# Altium PCB 0068Marquee.PcbDoc
Units mil, origin at the board's own origin, x right, y up, seen from the top; angles counter-clockwise.
Board outline 2677.17 x 314.96 mil, 2 copper layers (Top Layer, Bottom Layer); 18 components, 21 nets, 54 pads, 18 vias.
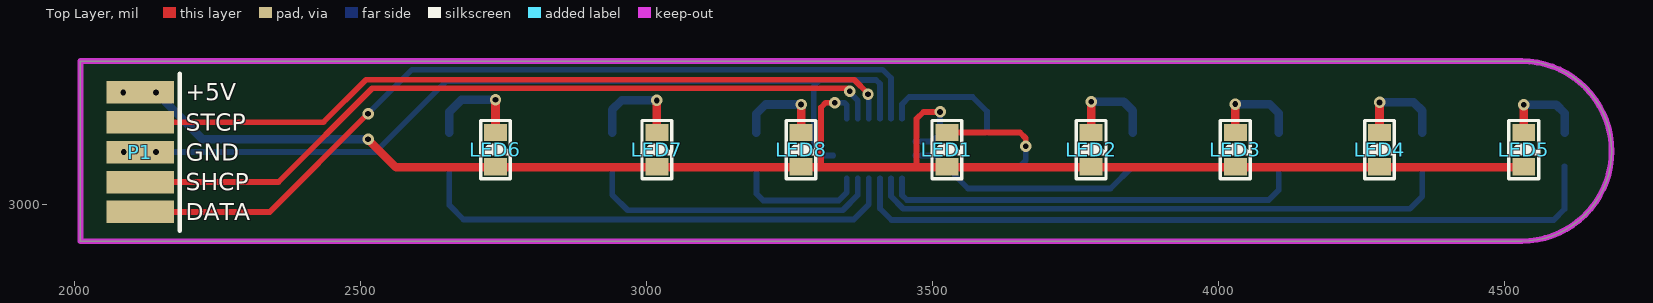
[diagram p0: Top Layer view]
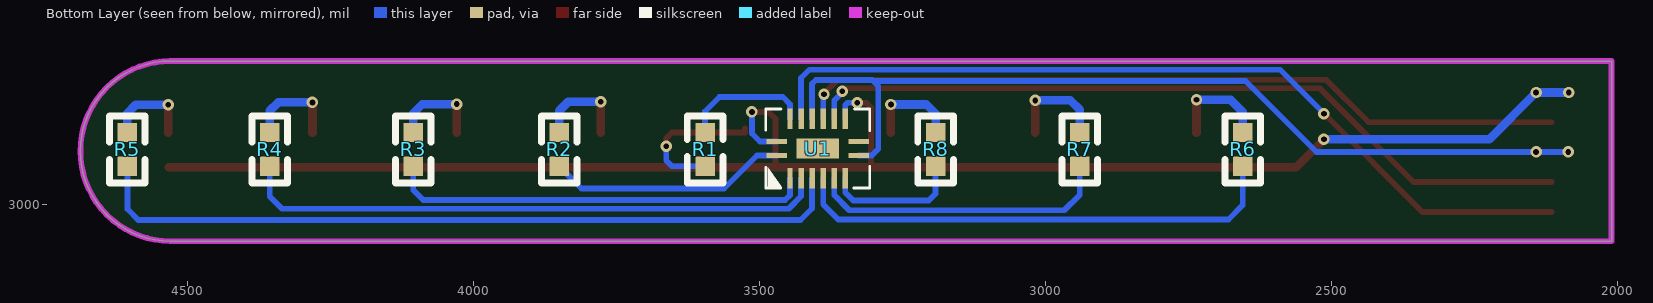
[diagram p1: Bottom Layer view, seen from below]

## Layer stack, top to bottom
Top Solder: solder mask 0.4, Solder Resist, Dk 3.5
Top Layer: signal copper 1.4
Dielectric 1: dielectric 12.6, FR-4, Dk 4.8
Bottom Layer: signal copper 1.4
Bottom Solder: solder mask 0.4, Solder Resist, Dk 3.5

## Board outline
2010,2935 4529.98,2935 ccw(c4529.69,3092.48) 4530,3249.96 2010,3249.96

## Design rules (kind name [scope] priority, off if disabled: settings)
Clearance [All] p1: gap=5
MinimumSolderMaskSliver [All] p1: minsoldermaskwidth=1
PolygonConnect [All] p1: connectstyle=Relief reliefconductorwidth=10 reliefentries=4 polygonreliefangle="90 Angle" airgapwidth=10
RoutingVias [All] p1: holewidth=28 width=50 viastyle="Through Hole" minholewidth=28 minwidth=50 maxholewidth=28 maxwidth=50
SilkToSilkClearance [All] p1: silktosilkclearance=2
SilkToSolderMaskClearance [IsPad] p1: minsilkscreentomaskgap=0 clearancetoexposedcopper=TRUE
SolderMaskExpansion [All] p1: expansion=4
Width [All] p1: maxlimit=100 minlimit=10 preferedwidth=15
27 further rules are at their usual default settings.

## Components (designator, comment, footprint, x,y, rotation, side; value= is the part's Value field where it differs from the comment)
LED1 "LED" SMDLED-0603 3525,3065 r180 top
LED2 "LED" SMDLED-0603 3777.14,3065 r180 top
LED3 "LED" SMDLED-0603 4029.29,3065 r180 top
LED4 "LED" SMDLED-0603 4281.43,3065 r180 top
LED5 "LED" SMDLED-0603 4533.57,3065 r180 top
LED6 "LED" SMDLED-0603 2735.71,3065 r180 top
LED7 "LED" SMDLED-0603 3017.86,3065 r180 top
LED8 "LED" SMDLED-0603 3270,3065 r180 top
P1 "CON5_1" HDR5X1_B 2115,3090 r270 top
R1 "2k" 0603P 3595,3125 r270 bottom
R2 "2k" 0603P 3850,3066.06 r90 bottom
R3 "2k" 0603P 4105,3066.06 r90 bottom
R4 "2k" 0603P 4356,3066.06 r90 bottom
R5 "2k" 0603P 4605,3066.06 r90 bottom
R6 "2k" 0603P 2655,3066.06 r90 bottom
R7 "2k" 0603P 2940,3066.06 r90 bottom
R8 "2k" 0603P 3192,3066.06 r90 bottom
U1 "75HC595" SOT763-1 3398,3097 r180 bottom

## Footprints (in the part's own frame and the unit in brackets; to place one, negate y for a bottom-side part, rotate by r counter-clockwise, add the part's x,y. Pads: shape width x height; smd on the part's side, far side on the other; paste and mask are expansions set on the pad)
0603P [mil]
  rect 33.94x33.94 smd: 1(0,0) 2(58.94,0)
  silkscreen extent -29,-31 88,31
HDR5X1_B [mm]
  rect 1x3 smd: 1(-2.68,0) 2(-1.35,0) 3(-0.02,0) 4(1.31,0) 5(2.64,0)
  silkscreen extent -3.5,1.74 3.48,1.74
SMDLED-0603 [mil]
  rect 40x30 smd: 1(0,0) 2(0,-60)
  silkscreen extent -27,-81 27,21
SOT763-1 [mm]
  rect 1.9x0.9 smd: 0(0,0)
  rect 0.9x0.24 smd: 1(-1.82,-0.31) 8(1.82,-0.31) 9(1.82,0.31) 16(-1.82,0.31)
  rect 0.24x0.9 smd: 2(-1.23,-1.32) 3(-0.74,-1.32) 4(-0.25,-1.32) 5(0.24,-1.32) 6(0.73,-1.32) 7(1.22,-1.32) 10(1.22,1.32) 11(0.73,1.32) 12(0.24,1.32) 13(-0.25,1.32) 14(-0.74,1.32) 15(-1.23,1.32)
  silkscreen extent -2.31,-1.75 2.31,1.76, body extent -2.09,-1.56 2.09,1.56, height 0.51

## Part data
P1: "Connector"
R1 R2 R3 R4 R5 R6 R7 R8: library part R, "贴片电阻"
U1: library part 74HC595, "IC 8BIT SHIFT REGISTER 16-DHVQFN"

## Via types
v1: diameter 20, hole 10, Top Layer to Bottom Layer, 18 vias

## Nets (pads, with @x,y where several pads share a name; then routed paths per layer and width w, separated by ;. In a path a pad name is that pad's centre, name@x,y a point inside that pad or via, vN(x,y) a via of type N, cw(c..) or ccw(c..) an arc to the next point about the centre after c; other vN are vias at no path point)
GND: P1.3 U1.8 U1.13 | length 1599.5
  Bottom Layer w10: v1(2086,3091) 2526,3091 2650,3215 3301,3215 ; U1.8 3303.41,3084.8 3292.2,3096 3292.2,3206.2 3303,3217 3401,3217 3407.84,3210.16 U1.13
  other v1: 2142,3091
NetLED1_2: LED1.2 R1.2 | length 260.3
  Top Layer w10: LED1.2@3525,3132 LED1.2 3653,3125 3663,3115 v1(3663,3101)
  Bottom Layer w10: R1.2 3653.06,3066.06 3663,3076 v1(3663,3101)
NetLED2_2: LED2.2 R2.2 | length 171.3
  Top Layer w15: LED2.2 v1(3777.14,3178.86)
  Bottom Layer w15: v1(3777.14,3178.86) 3834.14,3178.86 3850,3163 R2.2
NetLED3_2: LED3.2 R3.2 | length 165.9
  Top Layer w15: LED3.2 v1(4029.29,3174.71)
  Bottom Layer w15: v1(4029.29,3174.71) 4089.29,3174.71 4105,3159 R3.2
NetLED4_2: LED4.2 R4.2 | length 171.2
  Top Layer w15: LED4.2 v1(4281.43,3177.57)
  Bottom Layer w15: v1(4281.43,3177.57) 4341.43,3177.57 4356,3163 R4.2
NetLED5_2: LED5.2 R5.2 | length 160
  Top Layer w15: LED5.2 v1(4533.57,3173.57)
  Bottom Layer w15: v1(4533.57,3173.57) 4590.43,3173.57 4605,3159 R5.2
NetLED6_2: LED6.2 R6.2 | length 182.8
  Top Layer w15: LED6.2 v1(2735.71,3182.29)
  Bottom Layer w15: R6.2 2655,3161 2676.29,3182.29 v1(2735.71,3182.29)
NetLED7_2: LED7.2 R7.2 | length 180.7
  Top Layer w15: LED7.2 v1(3017.86,3181.14)
  Bottom Layer w15: R7.2 2940,3165 2956.14,3181.14 v1(3017.86,3181.14)
NetLED8_2: LED8.2 R8.2 | length 166.6
  Top Layer w15: LED8.2 v1(3270,3174)
  Bottom Layer w15: R8.2 3192,3158 3208,3174 v1(3270,3174)
NetP1_2: P1.2 U1.12 | length 1357
  Top Layer w10: P1.2 2435.15,3143.15 2509.29,3217.29 3363,3217.29 3387,3193.28 v1(3387,3192)
  Bottom Layer w10: U1.12 v1@3388.55,3192
NetP1_4: P1.4 U1.11 | length 1356.5
  Top Layer w10: P1.4 2356.43,3038.43 2520.29,3202.29 v1@3349.71,3202.29
  Bottom Layer w10: v1(3355,3197) 3355,3195 3369.26,3180.74 U1.11
NetP1_5: P1.5 U1.14 | length 1492.5
  Top Layer w10: P1.5 2341.06,2986.06 v1(2513,3158)
  Bottom Layer w10: v1(2513,3158) 2589.96,3234.96 3412.31,3234.96 3427.13,3220.13 U1.14
NetR1_1: R1.1 U1.15 | length 226.6
  Bottom Layer w10: U1.15 3446.43,3174.43 3459,3187 3570,3187 3595,3162 R1.1
NetR2_1: R2.1 U1.1 | length 420.5
  Bottom Layer w10: U1.1 3504.2,3084.8 3562,3027 3810.94,3027 R2.1
NetR3_1: R3.1 U1.2 | length 740.9
  Bottom Layer w10: U1.2 3446.43,3015.43 3455,3006.85 4087.85,3006.85 4105,3024 R3.1
NetR4_1: R4.1 U1.3 | length 1031.2
  Bottom Layer w10: U1.3 3427.13,3013.5 3448.79,2991.85 4334.85,2991.85 4356,3013 R4.1
NetR5_1: R5.1 U1.4 | length 1341.3
  Bottom Layer w10: U1.4 3407.84,2992.16 3428,2972 4586,2972 4605,2991 R5.1
NetR6_1: R6.1 U1.5 | length 868.4
  Bottom Layer w10: R6.1 2655,2998 2680,2973 3362,2973 3388.55,2999.55 U1.5
NetR7_1: R7.1 U1.6 | length 531
  Bottom Layer w10: R7.1 2940,3016 2967,2989 3342.74,2989 3369.26,3015.52 U1.6
NetR8_1: R8.1 U1.7 | length 241.9
  Bottom Layer w10: R8.1 3192,3018 3204,3006 3336,3006 3349.97,3019.97 U1.7
VCC_5V: LED1.1 LED2.1 LED3.1 LED4.1 LED5.1 LED6.1 LED7.1 LED8.1 P1.1 U1.10 U1.16 | length 2898.6
  Top Layer w10: 3305,3064 3305,3169 3313,3177 v1(3329,3177) ; 3472,3064 3472,3149 3484,3161 v1(3513,3161)
  Top Layer w15: v1(2513,3113) 2562,3064 3305,3064 3472,3064 LED5.1@4532.57,3064
  Bottom Layer w10: v1(3329,3177) 3346,3177 3349.97,3173.03 U1.10 ; U1.16 3498.8,3109.2 3513,3123.41 v1(3513,3161)
  Bottom Layer w15: v1(2085,3195) v1(2142,3195) 2224,3113 v1(2513,3113)
pads on no net: U1.0 U1.9

## Keep-outs
Keep-Out Layer:
  the board outline again, w10

## Text inside footprints (layer, text, board x,y; h text height)
P1: Top Overlay "+5V" at 2194.53,3181.34 h30; Top Overlay "STCP" at 2194.53,3127.8 h30; Top Overlay "GND" at 2194.53,3075.83 h30; Top Overlay "SHCP" at 2194.53,3023.86 h30; Top Overlay "DATA" at 2194.53,2971.89 h30